# Altium PCB myPCB.PcbDoc
Units mm, origin at the board's own origin, x right, y up, seen from the top; angles counter-clockwise.
Board outline 63.88 x 49.25 mm, 4 copper layers (Top Layer, GND_layer, 3.3V_layer, Bottom Layer), stack 0.603 mm thick; 89 components, 44 nets, 257 pads, 83 vias.
Unrouted connection lines stored in the file: 1.
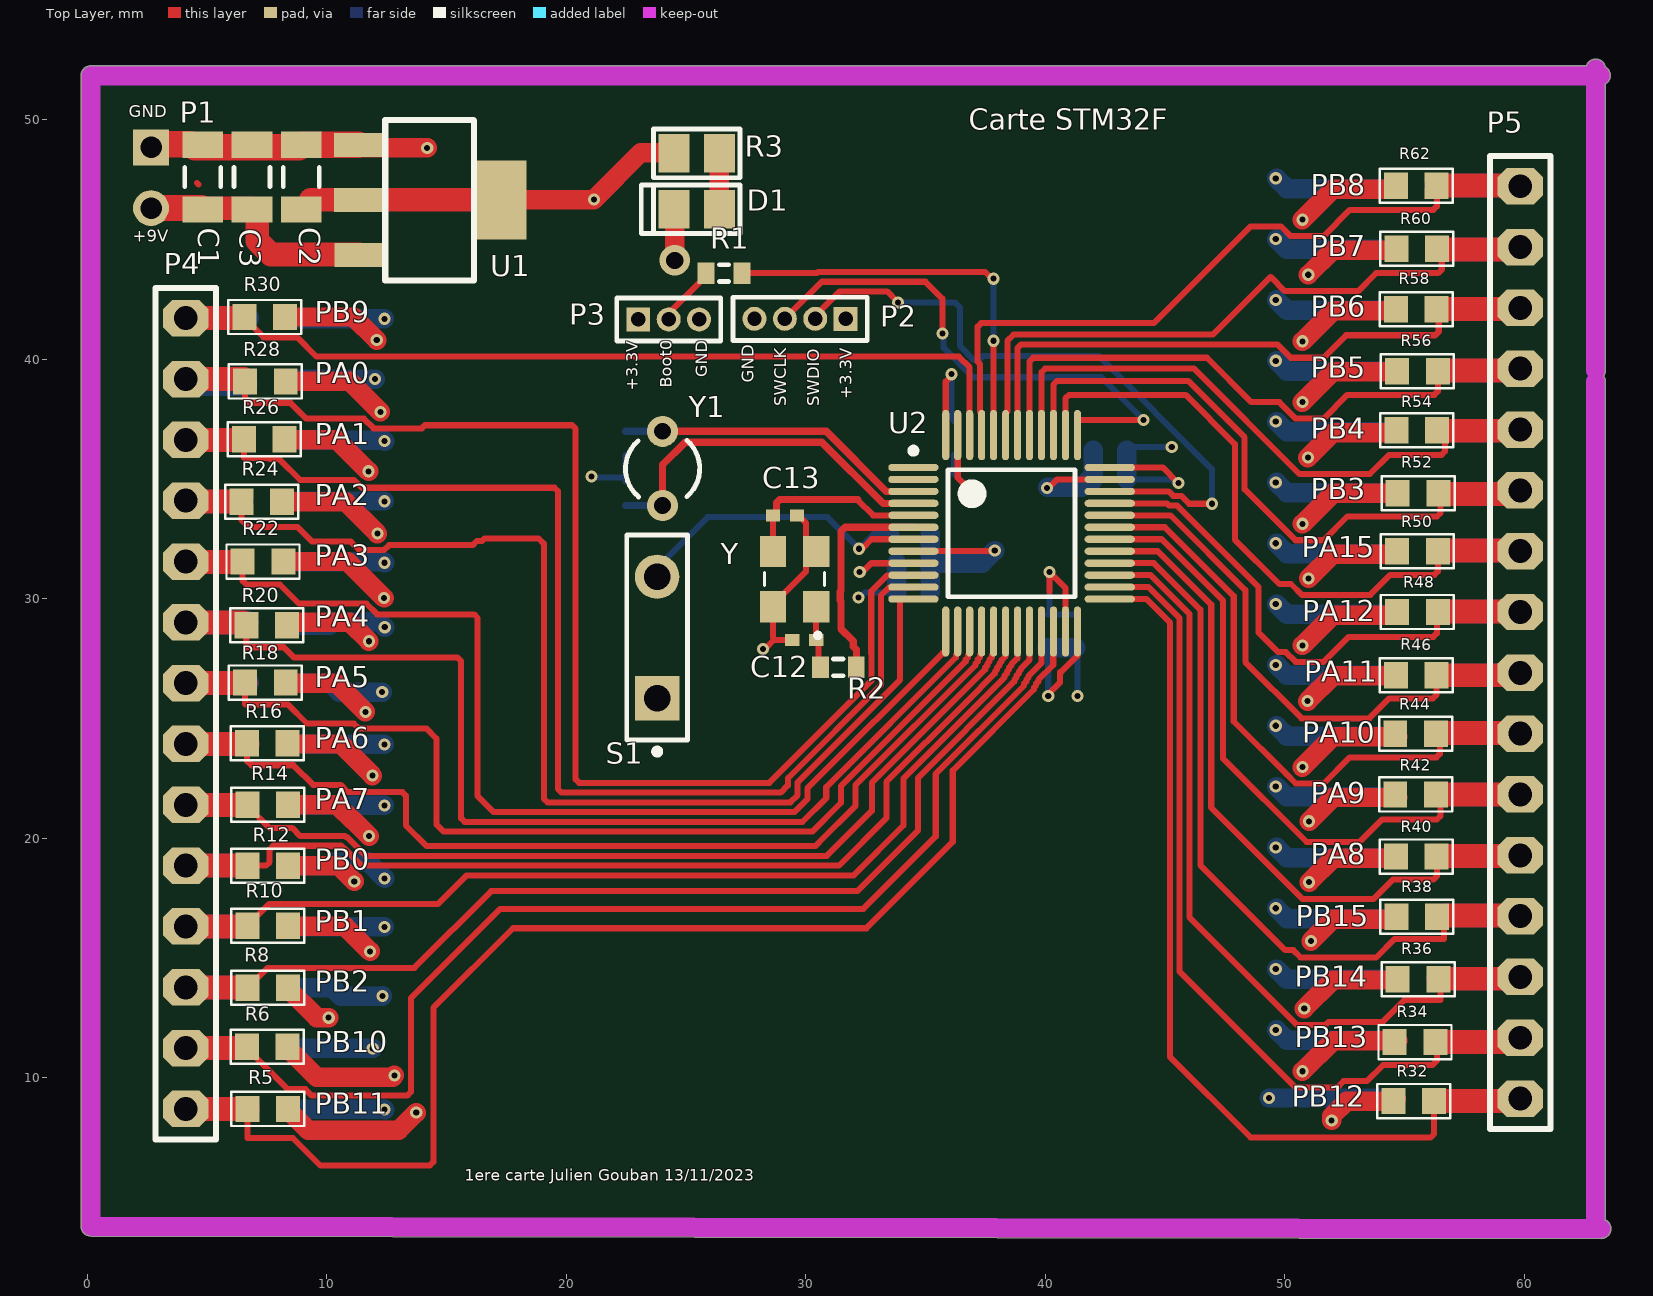
[diagram p0: Top Layer view]
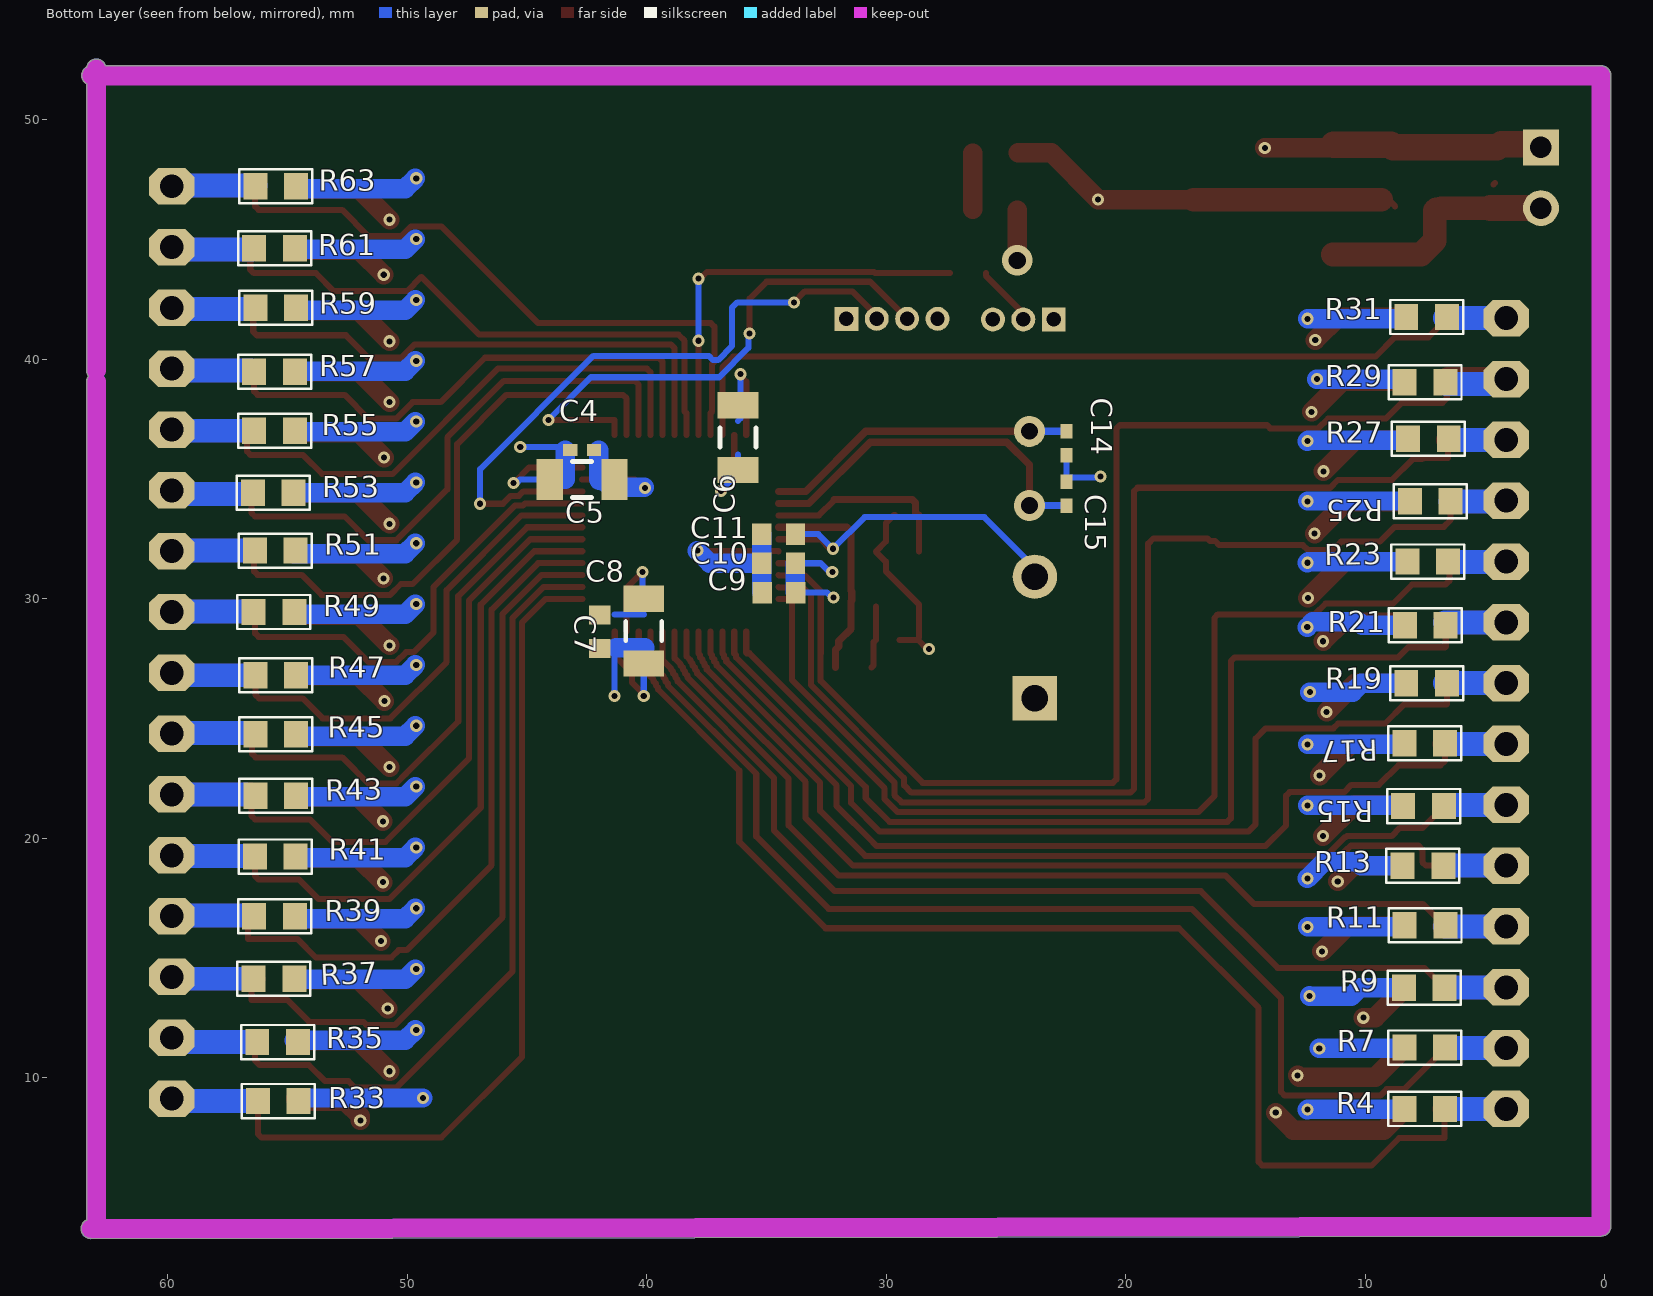
[diagram p1: Bottom Layer view, seen from below]
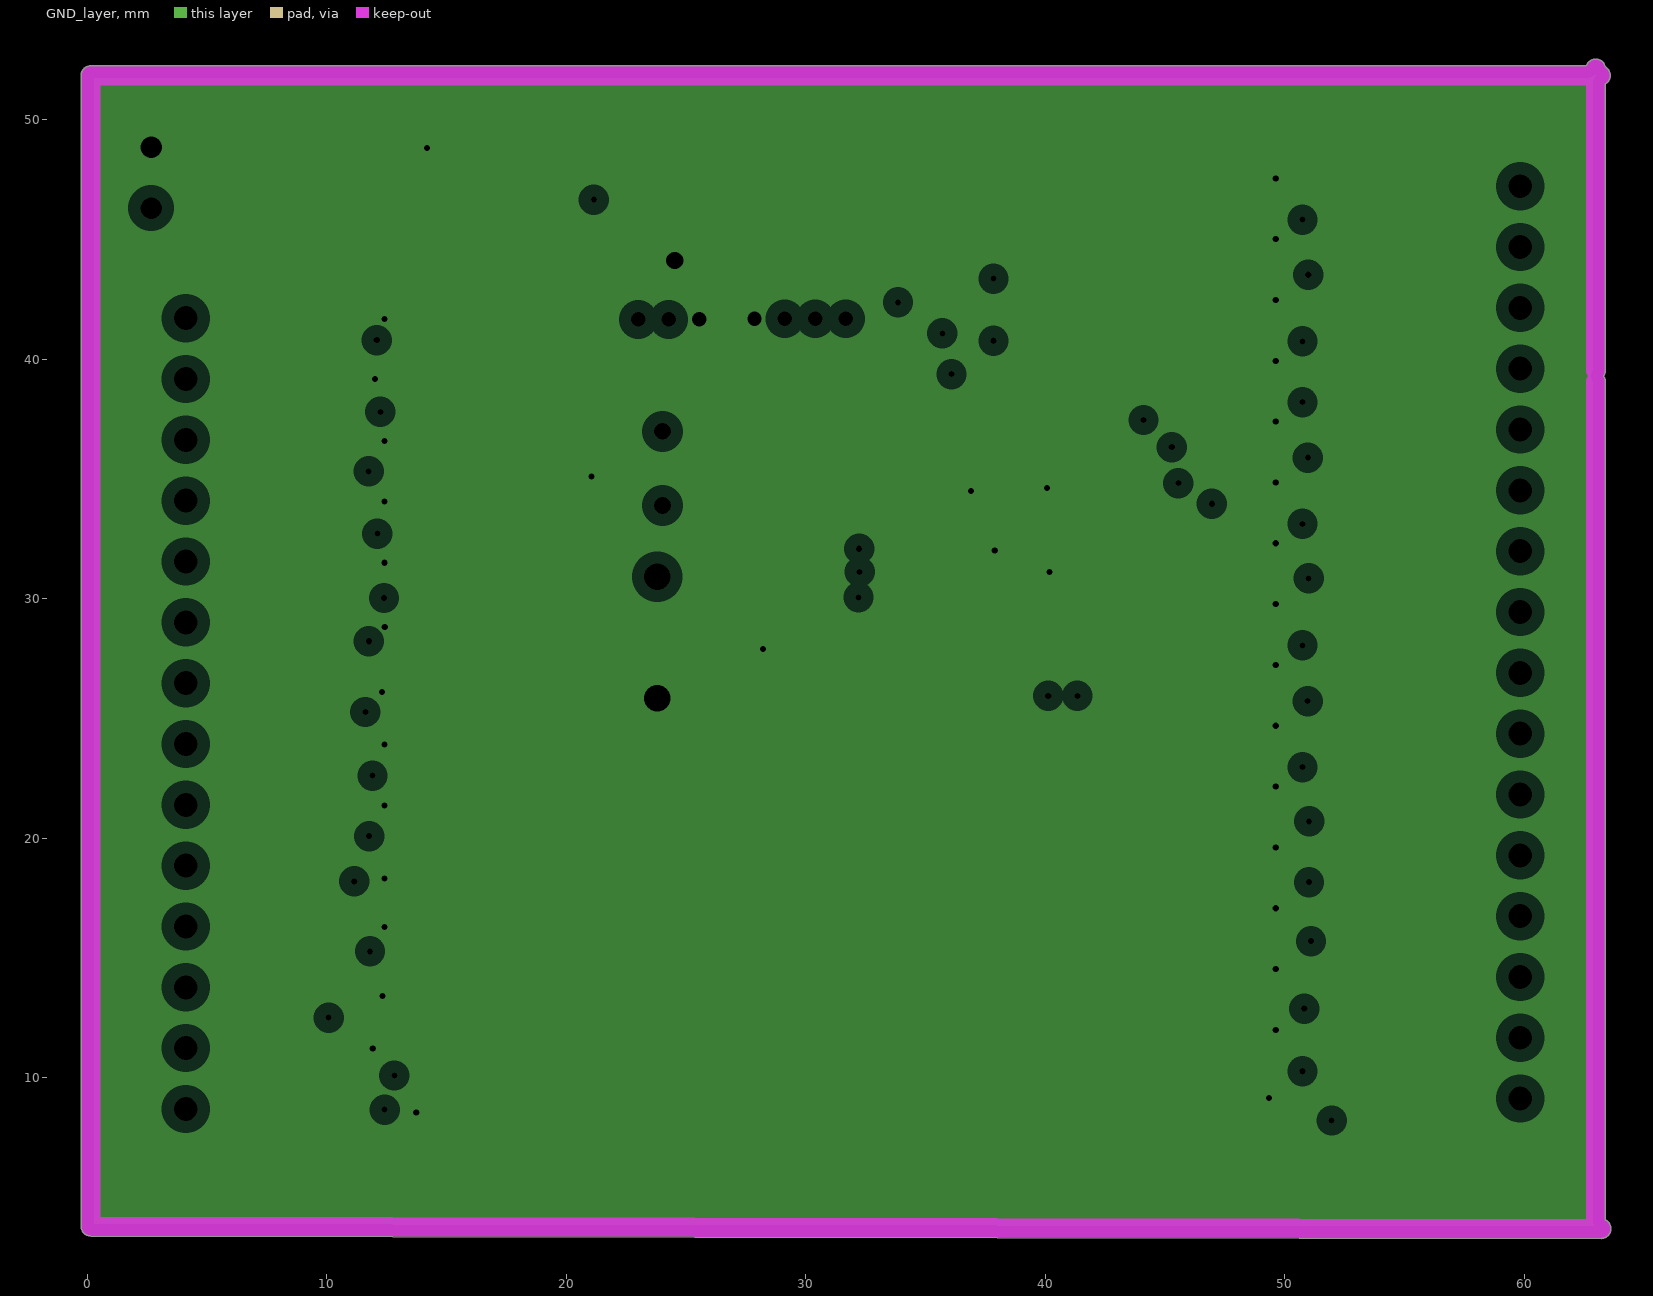
[diagram p2: GND_layer, clearances drawn from the general rule]
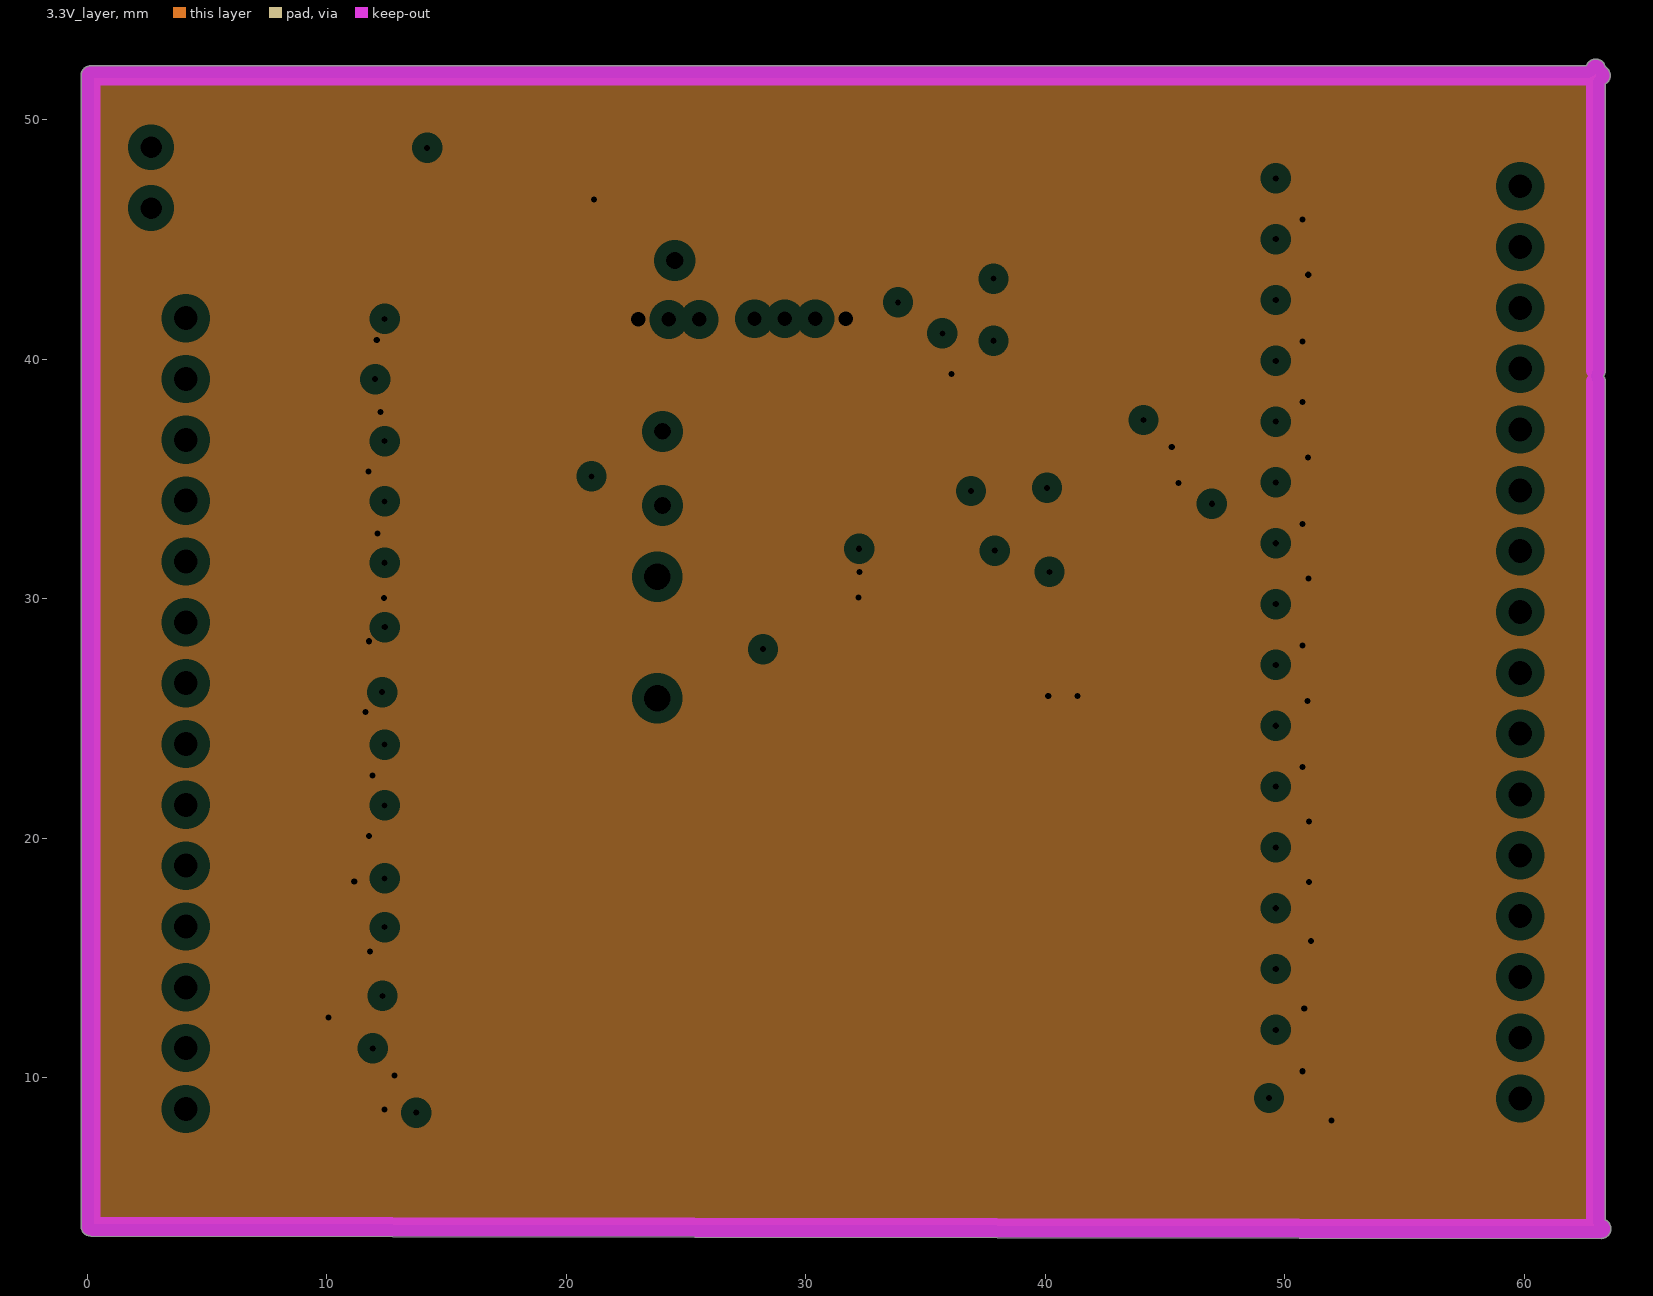
[diagram p3: 3.3V_layer, clearances drawn from the general rule]
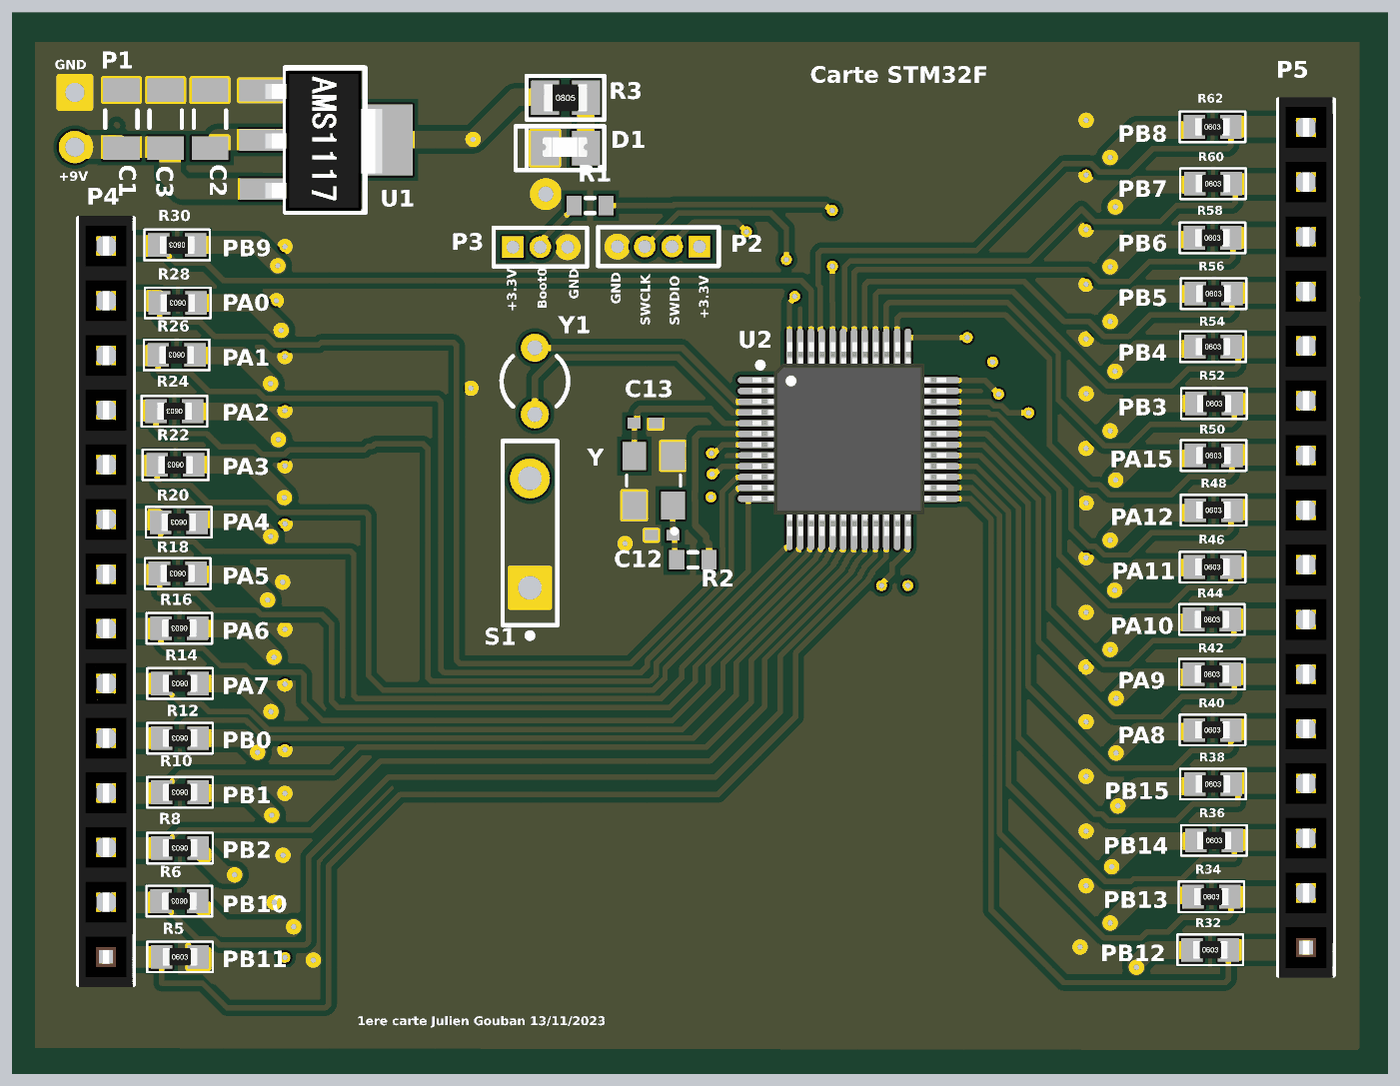
[diagram p4: 3D render of the assembled board from above, using the file's embedded part models]
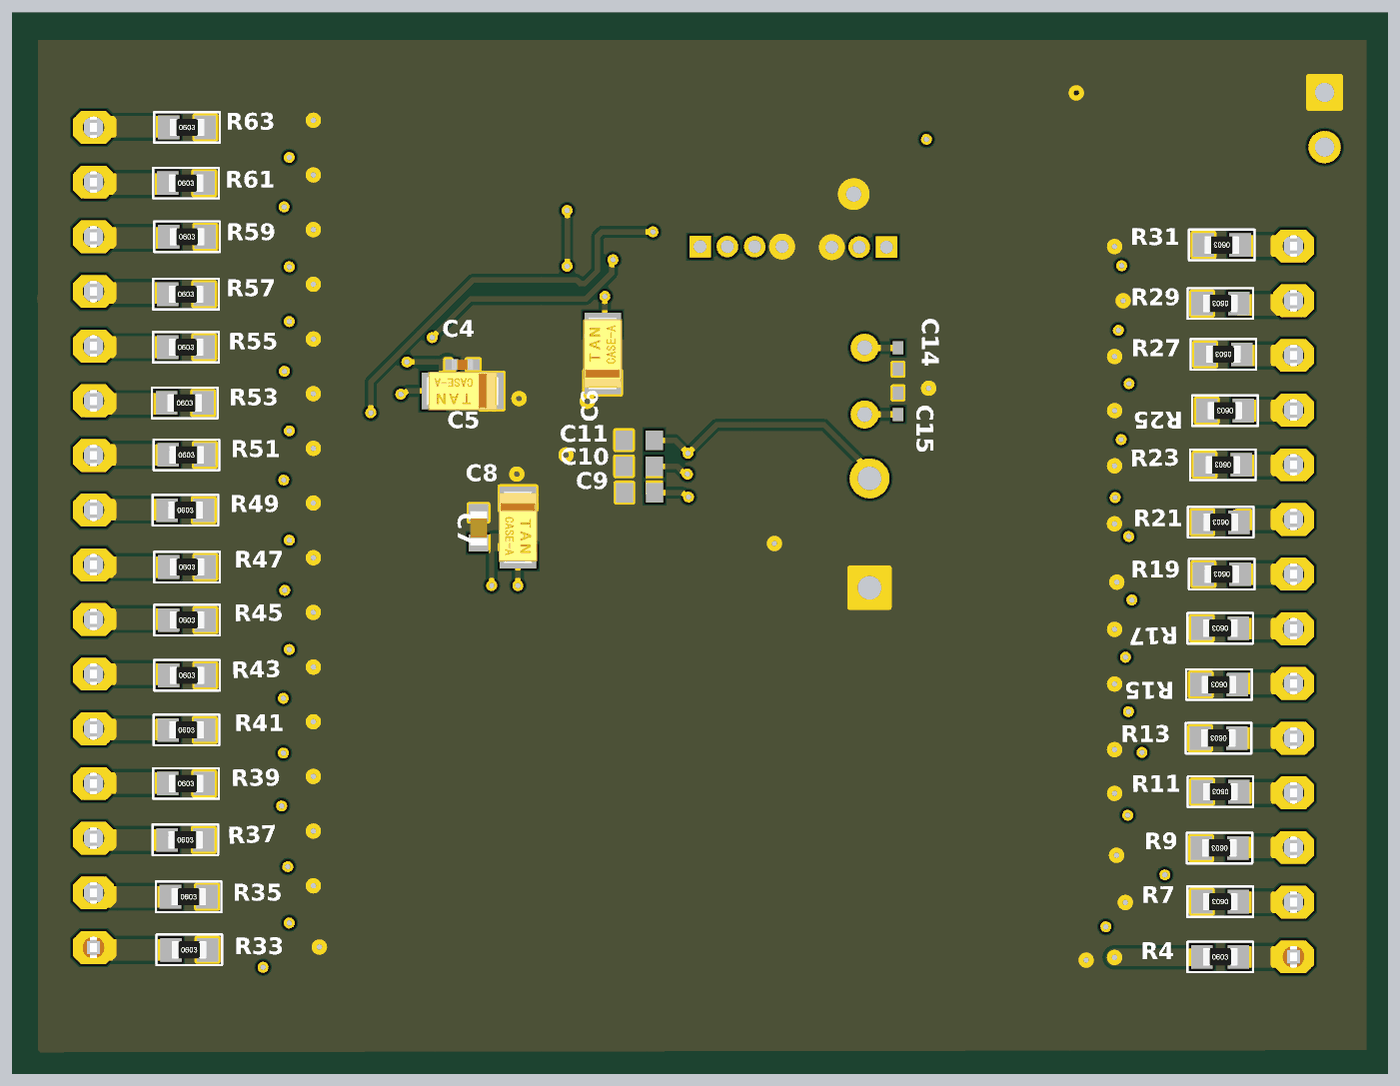
[diagram p5: 3D render of the assembled board from below, using the file's embedded part models]

## Layer stack, top to bottom
Top Solder: solder mask 0.0102, Solder Resist, Dk 3.5
Top Layer: signal copper 0.0356
Dielectric 2: prepreg 0.0711, PP-006, Dk 4.1
GND_layer: plane copper 0.035, net GND
Dielectric 1: dielectric 0.32, FR-4, Dk 4.8
3.3V_layer: plane copper 0.035, net +3.3V
Dielectric 3: prepreg 0.0711, PP-006, Dk 4.1
Bottom Layer: signal copper 0.0356
Bottom Solder: solder mask 0.0102, Solder Resist, Dk 3.5

## Board outline
0.152,3.38 cw(c0.152,3.787) -0.254,3.787 -0.254,51.841 cw(c0.152,51.841) 0.152,52.248 62.606,52.248 cw(c62.992,52.121) 63.391,52.198 cw(c63.195,51.841) 63.602,51.841 cw(c63.195,51.841) 63.399,51.489 63.399,39.531 cw(c62.992,39.531) 63.319,39.29 cw(c62.992,39.048) 63.399,39.048 63.399,13.436 63.399,4.048 cw(c63.221,3.682) 63.628,3.682 cw(c63.221,3.682) 63.221,3.276

## Design rules (kind name [scope] priority, off if disabled: settings)
Clearance "toplayer polygon" [InNamedPolygon('NONET_L01_P000')] p1: gap=0.254 ignorepadtopadclearanceinfootprint=FALSE
Clearance [All] p2: gap=0.152 ignorepadtopadclearanceinfootprint=FALSE
ComponentClearance IGNORE_Y_C12 [InComponent('Y') vs InComponent('C12')] p1: gap=0.254 collisioncheckmode=3 verticalgap=0.254 showdistances=FALSE donotcheckwithout3dbody=TRUE
ComponentClearance [All] p2: gap=0.254 collisioncheckmode=3 verticalgap=0.254 showdistances=FALSE
MinimumSolderMaskSliver [All] p1: minsoldermaskwidth=0.051
PlaneClearance [All] p1: clearance=0.508
PlaneConnect [All] p1: planeconnectstyle=Direct reliefexpansion=0.508 reliefentries=4 reliefconductorwidth=0.254 reliefairgap=0.254
PolygonConnect [All] p1: connectstyle=Direct reliefconductorwidth=0.254 reliefentries=4 polygonreliefangle="90 Angle" airgapwidth=0.254
RoutingVias [All] p1: holewidth=0.254 width=0.508 viastyle="Through Hole" minholewidth=0.254 minwidth=0.508 maxholewidth=0.711 maxwidth=1.27
SilkToSilkClearance [All] p1: silktosilkclearance=0.051
SilkToSolderMaskClearance [IsPad] p1: minsilkscreentomaskgap=0.051 clearancetoexposedcopper=TRUE
SolderMaskExpansion [All] p1: expansion=0.102 istentingtop=FALSE
UnConnectedPin [All] p1:
Width [All] p1: maxlimit=1.092 minlimit=0.254 preferedwidth=0.254
24 further rules are at their usual default settings.

## Classes and differential pairs
component class MCU: C4 C5 C6 C7 C8 C9 C10 C11 C12 C13 C14 C15 P2 P3 P4 P5 R1 R2 R4 R5 R6 R7 R8 R9 R10 R11 R12 R13 R14 R15 R16 R17 R18 R19 R20 R21 R22 R23 R24 R25 R26 R27 R28 R29 R30 R31 R32 R33 R34 R35 R36 R37 R38 R39 R40 R41 R42 R43 R44 R45 R46 R47 R48 R49 R50 R51 R52 R53 R54 R55 R56 R57 R58 R59 R60 R61 R62 R63 S1 U2 Y Y1
component class PowerSupply: C1 C2 C3 D1 P1 R3 U1

## Components (designator, comment, footprint, x,y, rotation, side; value= is the part's Value field where it differs from the comment)
C1 "Cap Semi" C1206 4.825,47.6 r270 top value=100nF
C2 "Tantalum Cap" C1206 8.94,47.6 r270 top value=100uF
C3 "Tantalum Cap" C1206 6.883,47.6 r270 top value=10uF
C4 "Cap Semi_4" 0402cap 42.709,36.195 r0 bottom value=100nF
C5 "tantalum cap" C1206tancap 42.702,34.976 r0 bottom value=100nF
C6 "tantalum cap" C1206tancap 36.196,36.717 r90 bottom value=100nF
C7 "tantalum cap" C1206tancap 40.133,28.64 r270 bottom value=100nF
C8 "Cap Semi_1" 1608[0603]cap 41.961,28.615 r270 bottom value=4.7uF
C9 "Cap Semi" 1608[0603] 34.483,30.251 r180 bottom value=10nF
C10 "Cap Semi" 1608[0603] 34.502,31.476 r180 bottom value=1uF
C11 "Cap Semi" 1608[0603] 34.502,32.69 r180 bottom value=4.7uF
C12 "Cap Semi" 0402 29.941,28.27 r0 top value=10pF
C13 "Cap Semi" 0402 29.141,33.477 r180 top value=10pF
C14 "Cap Semi" 0402 22.48,36.483 r90 bottom value=10pF
C15 "Cap Semi" 0402 22.48,34.383 r270 bottom value=10pF
D1 "LED" MY_LED_0805 25.45,46.33 r0 top
P1 "" HDR1X2H 2.666,48.844 r270 top
P2 "" MHDR1X4 31.674,41.681 r180 top
P3 "" MHDR1X3 23.012,41.656 r0 top
P4 "Header 14" MY_FE14 4.115,25.197 r90 top
P5 "Header 16" MY_FE16 59.842,28.169 r90 top
R1 "Res3" J1-0603 26.594,43.586 r180 top value=10R
R2 "Res3" J1-0603 31.37,27.127 r0 top value=10R
R3 "330R" MY_0805 25.45,48.59 r0 top
R4 "1K" MY_0603 7.518,8.687 r180 bottom
R5 "1K" MY_0603 7.544,8.687 r0 top
R6 "1K" MY_0603 7.518,11.278 r180 top
R7 "1K" MY_0603 7.518,11.252 r0 bottom
R8 "1K" MY_0603 7.544,13.741 r180 top
R9 "1K" MY_0603 7.544,13.741 r0 bottom
R10 "1K" MY_0603 7.544,16.332 r180 top
R11 "1K" MY_0603 7.507,16.358 r0 bottom
R12 "1K" MY_0603 7.544,18.847 r180 top
R13 "1K" MY_0603 7.595,18.847 r0 bottom
R14 "1K" MY_0603 7.544,21.387 r180 top
R15 "1K" MY_0603 7.569,21.336 r0 bottom
R16 "1K" MY_0603 7.518,23.952 r180 top
R17 "1K" MY_0603 7.518,23.952 r0 bottom
R18 "1K" MY_0603 7.442,26.492 r180 top
R19 "1K" MY_0603 7.442,26.467 r0 bottom
R20 "1K" MY_0603 7.493,28.88 r180 top
R21 "1K" MY_0603 7.493,28.88 r0 bottom
R22 "1K" MY_0603 7.341,31.547 r180 top
R23 "1K" MY_0603 7.391,31.547 r0 bottom
R24 "1K" MY_0603 7.29,34.036 r180 top
R25 "1K" MY_0603 7.29,34.061 r0 bottom
R26 "1K" MY_0603 7.391,36.652 r180 top
R27 "1K" MY_0603 7.366,36.678 r0 bottom
R28 "1K" MY_0603 7.442,39.065 r180 top
R29 "1K" MY_0603 7.507,39.04 r0 bottom
R30 "1K" MY_0603 7.417,41.758 r180 top
R31 "1K" MY_0603 7.442,41.758 r0 bottom
R32 "1K" MY_0603 55.397,9.017 r0 top
R33 "1K" MY_0603 55.397,9.017 r180 bottom
R34 "1K" MY_0603 55.448,11.481 r0 top
R35 "1K" MY_0603 55.423,11.481 r180 bottom
R36 "1K" MY_0603 55.575,14.097 r0 top
R37 "1K" MY_0603 55.575,14.122 r180 bottom
R38 "1K" MY_0603 55.524,16.713 r0 top
R39 "1K" MY_0603 55.55,16.739 r180 bottom
R40 "1K" MY_0603 55.499,19.228 r0 top
R41 "1K" MY_0603 55.524,19.228 r180 bottom
R42 "1K" MY_0603 55.474,21.819 r0 top
R43 "1K" MY_0603 55.499,21.768 r180 bottom
R44 "1K" MY_0603 55.474,24.359 r0 top
R45 "1K" MY_0603 55.499,24.333 r180 bottom
R46 "1K" MY_0603 55.499,26.797 r0 top
R47 "1K" MY_0603 55.499,26.797 r180 bottom
R48 "1K" MY_0603 55.55,29.439 r0 top
R49 "1K" MY_0603 55.575,29.439 r180 bottom
R50 "1K" MY_0603 55.55,31.979 r0 top
R51 "1K" MY_0603 55.524,32.004 r180 bottom
R52 "1K" MY_0603 55.575,34.392 r0 top
R53 "1K" MY_0603 55.601,34.417 r180 bottom
R54 "1K" MY_0603 55.524,37.033 r0 top
R55 "1K" MY_0603 55.55,37.008 r180 bottom
R56 "1K" MY_0603 55.55,39.497 r0 top
R57 "1K" MY_0603 55.55,39.472 r180 bottom
R58 "1K" MY_0603 55.499,42.088 r0 top
R59 "1K" MY_0603 55.499,42.139 r180 bottom
R60 "1K" MY_0603 55.524,44.602 r0 top
R61 "1K" MY_0603 55.55,44.628 r180 bottom
R62 "1K" MY_0603 55.499,47.244 r0 top
R63 "1K" MY_0603 55.499,47.219 r180 bottom
S1 "" SPST-2 23.801,28.372 r90 top
U1 "" "4-pin SOT" 12.446,46.634 r270 top
U2 "" STM-LQFP48_M 38.602,32.726 r0 top
Y "ECS-80-12-33-JGN-TR" XTAL_ECS-240-8-33-AGN-TR 29.541,30.81 r90 top
Y1 "" R38 24.029,35.433 r0 top

## Footprints (in the part's own frame and the unit in brackets; to place one, negate y for a bottom-side part, rotate by r counter-clockwise, add the part's x,y. Pads: shape width x height; smd on the part's side, far side on the other; paste and mask are expansions set on the pad)
"4-pin SOT" [mm]
  rect 1x2.2 smd: 0(2.286,-1.016) 1(-2.3,-1.05) 2(0,-1.05)
  rect 3.3x2.2 smd: 2(0,4.8)
  silkscreen extent -3.35,0 3.35,3.7, body extent -3.2,-1.72 3.3,5.28, height 1.36
0402 [mm] "Chip Capacitor, Body 1.0x0.5mm, IPC High Density"
  rect 0.6x0.5 smd: 1(-0.5,0) 2(0.5,0)
  body extent -0.55,-0.3 0.55,0.3, height 1.3
0402cap [mm]
  rect 0.6x0.5 smd: 1(-0.5,0) 2(0.5,0)
  body extent -0.5,-0.25 0.5,0.25, height 0.51
1608[0603] [mm] "Chip Capacitor, Body 1.6x0.8mm, IPC High Density"
  rect 0.8x0.9 smd: 1(-0.7,0) 2(0.7,0)
  body extent -0.87,-0.48 0.87,0.48, height 1.3
1608[0603]cap [mm]
  rect 0.8x0.9 smd: 1(-0.7,0) 2(0.7,0)
  body extent -0.77,-0.4 0.83,0.4, height 0.9
C1206 [mm] "Chip Capacitor, Body 3.2x1.6mm, IPC High Density"
  rect 1.1x1.7 smd: 1(-1.35,0) 2(1.35,0)
  silkscreen extent -0.4,-0.75 0.4,0.75, body extent -1.7,-0.9 1.7,0.9, height 1.3
C1206tancap [mm]
  rect 1.1x1.7 smd: 1(-1.35,0) 2(1.35,0)
  silkscreen extent -0.4,-0.75 0.4,0.75, body extent -1.7,-0.9 1.7,0.9, height 1.8
HDR1X2H [mm] "Connector; Header; 2 Position; Right Angle"
  rect 1.5x1.5 hole 0.9: 1(0,0)
  round 1.5 hole 0.9: 2(2.54,0)
J1-0603 [mm] "Chip Resistor, Body 1.6x0.8mm, IPC High Density"
  rect 0.7x0.9 smd: 1(-0.75,0) 2(0.75,0)
  silkscreen extent -0.2,-0.35 0.2,0.35, body extent -0.85,-0.48 0.85,0.48, height 0.9
MHDR1X3 [mm] "Connector; Header; 3 Position"
  rect 1x1 hole 0.6: 1(0,0)
  round 1 hole 0.6: 2(1.27,0) 3(2.54,0)
  silkscreen extent -0.9,-0.9 3.44,0.9
MHDR1X4 [mm] "Connector; Header; 4 Position"
  rect 1x1 hole 0.6: 1(0,0)
  round 1 hole 0.6: 2(1.27,0) 3(2.54,0) 4(3.81,0)
  silkscreen extent -0.9,-0.9 4.71,0.9
MY_0603 [mm]
  rect 1x1.1 smd: 1(-0.85,0) 2(0.85,0)
  silkscreen extent -1.52,-0.71 1.52,0.71, body extent -0.8,-0.4 0.8,0.4, height 0.44
MY_0805 [mm]
  rect 1.3x1.6 smd: 1(-0.95,0) 2(0.95,0)
  silkscreen extent -1.8,-1.02 1.8,1.02, body extent -1,-0.62 1,0.63, height 0.59
MY_FE14 [mm]
  oct 1.524x1.905 hole 1: 1(-16.51,0) 2(-13.97,0) 3(-11.43,0) 4(-8.89,0) 5(-6.35,0) 6(-3.81,0) 7(-1.27,0) 8(1.27,0) 9(3.81,0) 10(6.35,0) 11(8.89,0) 12(11.43,0) 13(13.97,0) 14(16.51,0)
  silkscreen extent -17.78,-1.27 17.78,1.27, body extent -17.9,-1.25 17.91,1.25, height 8.5
MY_FE16 [mm]
  oct 1.524x1.905 hole 1: 1(-19.05,0) 2(-16.51,0) 3(-13.97,0) 4(-11.43,0) 5(-8.89,0) 6(-6.35,0) 7(-3.81,0) 8(-1.27,0) 9(1.27,0) 10(3.81,0) 11(6.35,0) 12(8.89,0) 13(11.43,0) 14(13.97,0) 15(16.51,0) 16(19.05,0)
  silkscreen extent -20.32,-1.27 20.32,1.27, body extent -20.44,-1.25 20.45,1.25, height 8.5
MY_LED_0805 [mm]
  rect 1.3x1.6 smd: A(0.95,-0.076) K(-0.95,-0.076)
  silkscreen extent -2.31,-1.09 1.8,0.94, body extent -1.06,-0.48 1.01,0.42, height 0.86
R38 [mm] "Crystal, Thru-Hole; 2 Leads; Body 3.1 x 8.2 mm (Dia.xH)"
  round 1.3 hole 0.7: 1(0,1.55) 2(0,-1.55)
  silkscreen extent -1.55,-1.19 1.55,1.17
SPST-2 [mm] "Switch; 2 Leads"
  rect 1.85x1.85 hole 1.1: 1(-2.54,0)
  round 1.85 hole 1.1: 2(2.54,0)
  silkscreen extent -4.89,-1.27 4.28,1.27
STM-LQFP48_M [mm]
  oval 2.1x0.3 smd: 1(-4.1,2.75) 2(-4.1,2.25) 3(-4.1,1.75) 4(-4.1,1.25) 5(-4.1,0.75) 6(-4.1,0.25) 7(-4.1,-0.25) 8(-4.1,-0.75) 9(-4.1,-1.25) 10(-4.1,-1.75) 11(-4.1,-2.25) 12(-4.1,-2.75) 25(4.1,-2.75) 26(4.1,-2.25) 27(4.1,-1.75) 28(4.1,-1.25) 29(4.1,-0.75) 30(4.1,-0.25) 31(4.1,0.25) 32(4.1,0.75) 33(4.1,1.25) 34(4.1,1.75) 35(4.1,2.25) 36(4.1,2.75)
  oval 0.3x2.1 smd: 13(-2.75,-4.1) 14(-2.25,-4.1) 15(-1.75,-4.1) 16(-1.25,-4.1) 17(-0.75,-4.1) 18(-0.25,-4.1) 19(0.25,-4.1) 20(0.75,-4.1) 21(1.25,-4.1) 22(1.75,-4.1) 23(2.25,-4.1) 24(2.75,-4.1) 37(2.75,4.1) 38(2.25,4.1) 39(1.75,4.1) 40(1.25,4.1) 41(0.75,4.1) 42(0.25,4.1) 43(-0.25,4.1) 44(-0.75,4.1) 45(-1.25,4.1) 46(-1.75,4.1) 47(-2.25,4.1) 48(-2.75,4.1)
  silkscreen extent -4.22,-2.65 2.65,3.57, body extent -4.47,-4.49 4.53,4.51, height 1.56
XTAL_ECS-240-8-33-AGN-TR [mm]
  rect 1.3x1.1 smd: 1(-1.15,-0.9) 2(1.15,-0.9) 3(1.15,0.9) 4(-1.15,0.9)
  silkscreen extent -2.45,-1.25 0.27,1.25

## Part data
C1 C4 C9 C10 C11 C12 C13 C14 C15: "Capacitor (Semiconductor SIM Model)", LatestRevisionDate=29-May-2009, LatestRevisionNote="IPC-7351 Footprint Added.", PackageDescription="Chip Capacitor", PackageReference=C1206, Published=8-Jun-2000, Publisher="Altium Limited"
C2 C3: library part "Cap Semi", "Capacitor (Semiconductor SIM Model)", LatestRevisionDate=29-May-2009, LatestRevisionNote="IPC-7351 Footprint Added.", PackageDescription="Chip Capacitor", PackageReference=C1206, Published=8-Jun-2000, Publisher="Altium Limited"
C5: library part "Cap Semi_5", "Capacitor (Semiconductor SIM Model)", LatestRevisionDate=29-May-2009, LatestRevisionNote="IPC-7351 Footprint Added.", PackageDescription="Chip Capacitor", PackageReference=C1206, Published=8-Jun-2000, Publisher="Altium Limited"
C6 C7: library part "Cap Semi_6", "Capacitor (Semiconductor SIM Model)", LatestRevisionDate=29-May-2009, LatestRevisionNote="IPC-7351 Footprint Added.", PackageDescription="Chip Capacitor", PackageReference=C1206, Published=8-Jun-2000, Publisher="Altium Limited"
C8: library part "Cap Semi_1_1", "Capacitor (Semiconductor SIM Model)", LatestRevisionDate=29-May-2009, LatestRevisionNote="IPC-7351 Footprint Added.", PackageDescription="Chip Capacitor", PackageReference=C1206, Published=8-Jun-2000, Publisher="Altium Limited"
D1: "Typical INFRARED GaAs LED", ASiD Part Number=LED-AS
P1: library part "Header 2H", "Header, 2-Pin, Right Angle", Voltage=9V, LatestRevisionDate=17-Jul-2002, LatestRevisionNote="Re-released for DXP Platform.", Publisher="Altium Limited"
P2: library part MHDR1X4, "Header, 4-Pin", LatestRevisionDate=17-Jul-2002, LatestRevisionNote="Re-released for DXP Platform.", Publisher="Altium Limited"
P3: library part MHDR1X3, "Header, 3-Pin", LatestRevisionDate=17-Jul-2002, LatestRevisionNote="Re-released for DXP Platform.", Publisher="Altium Limited"
P4: "Header, 14-Pin", ASiD Part Number="Header 14-AS"
P5: "Header, 16-Pin", ASiD Part Number="Header 16-AS"
R1 R2: "Resistor", LatestRevisionDate=29-May-2009, LatestRevisionNote="IPC-7351 Footprint Added.", PackageDescription="Chip Resistor", PackageReference=J1-0603, Published=8-Jun-2000, Publisher="Altium Limited"
R3 R4 R5 R6 R7 R8 R9 R10 R11 R12 R13 R14 R15 R16 R17 R18 R19 R20 R21 R22 R23 R24 R25 R26 R27 R28 R29 R30 R31 R32 R33 R34 R35 R36 R37 R38 R39 R40 R41 R42 R43 R44 R45 R46 R47 R48 R49 R50 R51 R52 R53 R54 R55 R56 R57 R58 R59 R60 R61 R62 R63: library part Res, "Standard resistor", ASiD Part Number=Res-AS
S1: library part SW-PB, "Switch", LatestRevisionDate=17-Jul-2002, LatestRevisionNote="Re-released for DXP Platform.", PackageDescription="Switch; 2 Leads", PackageReference=SPST-2, Published=24-Mar-1999, Publisher="Altium Limited"
U1: library part LM1117, "The LM1117 is a low dropout voltage regulator with a / dropout of 1.2 V at 800 mA of load current. / The LM1117 is available in an adjustable version, / which can set the output voltage from 1.25 V to 13.8 V / with only two external resistors. In addition, the device / is available in five fixed voltages, 1.8 V, 2.5 V, 3.3 V, / and 5 V. / The LM1117 offers current limiting and thermal / shutdown. The circuit includes a Zener trimmed band- / gap reference to assure output voltage accuracy to / within ±1%. / A minimum of 10-μF tantalum capacitor is required / at the output to improve the transient response and / stability.", Output voltage=3.3V, ComponentLink1Description=Datasheet, ComponentLink1URL=https://www.ti.com/lit/ds/symlink/lm1117.pdf?ts=1696488593782&ref_url=https%253A%252F%252Fwww.google.com%252F
U2: library part STM32F103C8T6, "ARM Cortex-M3 32-bit MCU, 64 KB Flash, 20 KB Internal RAM, 37 I/Os, 48-pin LQFP, -40 to 85 degC, Tray", I/Os (High Current)=37, Operating Frequency(F) (Processor speed) (MHz)=72, Supply Voltage(Vcc) min (V)=2, A/D Converter="2x12-bit (10 Channel)", ComponentLink1Description="Manufacturer URL", ComponentLink1URL=http://www.st.com/web/en/home.html, ComponentLink2Description=Datasheet, ComponentLink2URL=http://www.st.com/st-web-ui/static/active/en/resource/technical/document/datasheet/CD00161566.pdf, ComponentLink3Description="Package Specification", ComponentLink3URL=http://www.st.com/st-web-ui/static/active/en/resource/technical/document/datasheet/DM00058181.pdf, Core="ARM Cortex-M3", DatasheetVersion="Rev. 16", FLASH Size (Prog) (kB)=64, Internal RAM Size (kB)=20, Mounting Technology="Surface Mount", PackageDescription="48-Pin Low Profile Quad Flat Package, 7 x 7 mm Body, 0.5 mm Pitch", PackageReference=LQFP48, PackageVersion="Rev. 6, 06/2013", Packing=Tray, PartNumber=STM32F103C8T6
Y: "8MHz Â±20ppm Crystal 12pF 400 Ohms 4-SMD, No Lead", Package="SMD-4 ECS International", Availability=Warning, BuyPart=h, MF="ECS Inc.", Mouser-Purchase-URL=https://snapeda.com/shop?store=Mouser&id=4477300, MP=ECS-80-12-33-JGN-TR, Price=None, SnapEDA_Link=https://www.snapeda.com/parts/ECS-80-12-33-JGN-TR/ECS%20Inc./view-part/4477300/?ref=snap
Y1: library part XTAL, "Crystal Oscillator", LatestRevisionDate=17-Jul-2002, LatestRevisionNote="Re-released for DXP Platform.", PackageDescription="Crystal, Thru-Hole; 2 Leads; Body 3.1 x 8.2 mm (Dia.xH)", PackageReference=R38, Published=8-Jun-2000, Publisher="Altium Limited"

## Via types
v1: diameter 0.508, hole 0.254, Top Layer to Bottom Layer, 82 vias
v2: diameter 1.27, hole 0.711, Top Layer to Bottom Layer, 1 vias

## Nets (pads, with @x,y where several pads share a name; then routed paths per layer and width w, separated by ;. In a path a pad name is that pad's centre, name@x,y a point inside that pad or via, vN(x,y) a via of type N, cw(c..) or ccw(c..) an arc to the next point about the centre after c; other vN are vias at no path point)
32KHz_01: C14.2 U2.3 Y1.1 | length 13.1
  Top Layer w0.3: Y1.1 30.861,36.983 33.368,34.476 U2.3
  Bottom Layer w0.3: C14.2 Y1.1
32KHz_02: C15.2 U2.4 Y1.2 | length 15.2
  Top Layer w0.3: Y1.2 24.029,35.585 24.975,36.531 30.674,36.531 33.229,33.976 U2.4
  Bottom Layer w0.3: C15.2 Y1.2
+3.3V: C2.2 C4.2 C5.2 C6.2 C7.2 C8.2 C9.2 C10.2 P2.1 P3.1 R3.1 R4.1 R6.1 R8.1 R10.1 R12.1 R14.1 R16.1 R18.1 R20.1 R22.1 R24.1 R26.1 R28.1 R30.1 R32.1 R34.1 R36.1 R38.1 R40.1 R42.1 R44.1 R46.1 R48.1 R50.1 R52.1 R54.1 R56.1 R58.1 R60.1 R62.1 U1.2 U2.9 U2.24 U2.36 U2.48 | length 168.5
  Top Layer w0.254: C2.2@8.754,46.377 C2.2@9.154,46.777 ; U1.2@17.169,46.65 U1.2@17.179,46.66 ; R3.1@24.485,48.616 24.485,48.605 R3.1 ; v1(32.259,31.115) 32.383,31.115 32.743,31.476 U2.9 ; U2.48 35.852,39.059 36.094,39.301 v1(36.094,39.37) ; v1(40.133,25.933) 40.133,26.01 40.615,26.492 40.615,26.924 40.657,26.924 41.343,27.61 41.343,28.617 U2.24 ; U2.36 44.916,35.476 v1(45.568,34.823)
  Top Layer w0.813: R24.1@8.233,34.036 10.795,34.036 v1(12.116,32.715) ; R22.1@8.284,31.547 10.871,31.547 v1(12.395,30.023) ; R26.1@8.335,36.627 10.439,36.627 v1(11.752,35.314) ; R30.1@8.36,41.758 11.125,41.758 v1(12.09,40.793) ; R6.1@8.368,11.252 8.368,11.228 9.588,10.008 12.751,10.008 v1(12.827,10.084) ; R28.1@8.386,39.065 10.973,39.065 v1(12.245,37.793) ; R8.1@8.394,13.767 8.394,13.691 9.588,12.497 v1(10.084,12.497) ; R10.1@8.394,16.307 10.77,16.307 v1(11.811,15.266) ; R12.1 10.49,18.847 v1(11.15,18.187) ; R14.1 10.439,21.387 11.093,20.733 11.119,20.733 v1(11.773,20.079) ; R16.1@8.394,23.927 10.592,23.927 v1(11.913,22.606) ; R18.1@8.394,26.467 10.414,26.467 v1(11.617,25.264) ; R20.1@8.394,29.007 10.973,29.007 v1(11.764,28.216) ; U1.2@17.179,46.66 v1(21.158,46.66) 23.113,48.616 R3.1@24.485,48.616 ; v1(50.749,10.262) 52.019,11.532 R34.1@54.725,11.532 ; v1(50.749,22.962) 52.019,24.232 R44.1@54.725,24.232 ; v1(50.749,28.042) 52.019,29.312 R48.1@54.725,29.312 ; v1(50.749,33.122) 52.019,34.392 R52.1 ; v1(50.749,38.202) 52.019,39.472 R56.1@54.725,39.472 ; v1(50.749,40.742) 52.019,42.012 R58.1@54.725,42.012 ; v1(50.749,45.822) 52.019,47.092 R62.1@54.725,47.092 ; v1(50.822,12.874) 52.019,14.072 R36.1@54.725,14.072 ; v1(50.963,25.715) 52.019,26.772 R46.1@54.725,26.772 ; v1(50.976,35.888) 52.019,36.932 R54.1@54.725,36.932 ; v1(50.991,43.524) 52.019,44.552 R60.1@54.725,44.552 ; v1(51.007,30.84) 52.019,31.852 R50.1@54.725,31.852 ; v1(51.022,18.155) 52.019,19.152 R40.1@54.725,19.152 ; v1(51.026,20.698) 52.019,21.692 R42.1@54.725,21.692 ; v1(51.105,15.697) 52.019,16.612 R38.1@54.725,16.612 ; v1(51.968,8.204) 51.968,8.382 52.587,9.001 54.581,9.001 54.674,9.094 R32.1@54.674,9.144
  Top Layer w0.991: C2.2@9.34,46.65 U1.2@17.169,46.65
  Bottom Layer w0.254: R4.1 R4.1@8.394,8.661 ; v1(32.207,30.048) 32.276,30.048 32.479,30.251 C9.2 C9.2@33.802,30.271 ; v1(32.259,31.115) 32.383,31.115 32.743,31.476 C10.2 ; v1(36.094,39.37) 36.094,37.519 36.196,37.417 ; v1(40.133,25.933) 40.133,27.94 ; 41.338,27.94 41.352,27.926 v1(41.352,25.933) ; 43.409,34.983 43.402,34.976 45.292,34.976 45.445,34.823 v1(45.568,34.823) ; C4.2@43.409,36.195 43.536,36.322 v1(45.288,36.322)
  Bottom Layer w0.813: R4.1@8.394,8.661 8.407,8.674 12.408,8.674 v1(12.421,8.661) ; C9.2@33.802,30.271 C10.2 ; 40.082,27.94 40.133,27.94 41.287,27.94 ; 43.409,34.983 C4.2@43.409,36.195
+9V: C1.2 C3.2 P1.2 U1.0 | length 10.1
  Top Layer w0.254: 4.593,47.346 4.648,47.291
  Top Layer w0.991: C1.2@4.825,46.304 C3.2@6.676,46.304 ; C3.2@6.828,46.304 C3.2 7.043,46.25 7.097,46.195 7.097,44.944 7.678,44.364 U1.0@11.353,44.364
  Top Layer w1.092: P1.2 C1.2@4.771,46.304
BOOT0: P3.2 R1.2 | length 2.6
  Top Layer w0.254: P3.2 24.425,41.799 24.425,42.068 25.844,43.486 R1.2
GND: C1.1 C2.1 C3.1 C4.1 C5.1 C6.1 C7.1 C8.1 C9.1 C10.1 C11.1 C12.1 C13.1 C14.1 C15.1 D1.K P1.1 P2.4 P3.3 R5.2 R7.2 R9.2 R11.2 R13.2 R15.2 R17.2 R19.2 R21.2 R23.2 R25.2 R27.2 R29.2 R31.2 R33.2 R35.2 R37.2 R39.2 R41.2 R43.2 R45.2 R47.2 R49.2 R51.2 R53.2 R55.2 R57.2 R59.2 R61.2 R63.2 S1.1 U1.1 U2.8 U2.23 U2.35 U2.47 Y.2 Y.4 | length 191.6
  Top Layer w0.254: C2.1@8.835,48.844 C2.1 ; U1.1@11.319,48.95 U1.1@11.45,48.819 ; D1.K D1.K@24.536,46.218 ; v1(28.22,27.889) 28.289,27.889 28.67,28.27 C12.1 ; 28.641,28.366 Y.4 28.641,29.76 30.018,31.137 30.018,31.537 Y.2 30.018,32.383 30.018,33.15 29.691,33.477 C13.1 ; U2.8 34.511,31.985 37.878,31.985 v1(37.898,32.004) ; U2.47 36.352,35.048 v1(36.907,34.493) ; v1(40.082,34.62) 40.151,34.62 40.506,34.976 U2.35 ; 40.184,30.301 v1(40.184,31.115) 40.852,30.447 U2.23
  Top Layer w0.813: R5.2 8.487,8.593 8.487,8.543 9.228,7.802 13,7.802 13.005,7.798 v1(13.741,8.534) ; U1.1@11.45,48.819 v1(14.198,48.819) ; v2(24.536,44.12) D1.K@24.536,46.218
  Top Layer w1.092: P1.1@2.48,48.971 C1.1@4.309,48.971 ; C1.1@4.496,48.844 C2.1@8.835,48.844 ; C2.1 U1.1@11.319,48.95
  Bottom Layer w0.254: v1(21.057,35.103) 21.106,35.054 22.357,35.054 C15.1@22.48,34.931 ; C15.1 C15.1@22.48,34.931 ; C14.1 C15.1@22.48,34.931 ; C9.1 C9.1@35.202,30.271 ; 36.196,36.017 36.196,35.204 v1(36.907,34.493) ; v1(40.082,34.62) v1@40.115,34.653 ; v1(40.184,31.115) 40.184,29.391 40.133,29.34 41.338,29.34 41.352,29.326 ; 42.002,34.976 42.009,34.983 ; v1(49.632,11.989) v1@49.666,11.989
  Bottom Layer w0.813: R19.2@8.386,26.454 10.172,26.454 10.532,26.093 v1(12.318,26.093) ; R7.2@8.407,11.214 v1(11.923,11.214) ; R9.2@8.407,13.754 10.222,13.754 10.583,13.393 12.318,13.393 v1(12.331,13.406) ; R11.2@8.407,16.294 v1@12.408,16.294 ; R13.2@8.407,18.834 10.164,18.834 10.329,18.999 11.735,18.999 v1(12.421,18.313) ; R15.2@8.407,21.374 v1@12.408,21.374 ; R17.2@8.407,23.914 v1@12.408,23.914 ; R21.2@8.407,28.859 8.427,28.88 10.122,28.88 10.271,29.029 12.199,29.029 v1(12.424,28.803) ; R23.2@8.407,31.534 12.383,31.534 v1(12.422,31.496) ; R25.2@8.407,34.074 v1@12.408,34.074 ; R27.2@8.407,36.614 12.38,36.614 v1(12.421,36.574) ; R29.2@8.407,39.154 12.011,39.154 v1(12.022,39.165) ; R31.2@8.407,41.694 v1@12.408,41.694 ; C9.1@35.202,30.271 C10.1 ; C11.1 C10.1 ; v1(37.898,32.004) 37.369,31.476 C10.1 ; v1@40.115,34.653 41.526,34.653 41.805,34.932 41.996,34.932 42.002,34.939 42.002,34.976 ; 42.009,34.983 C4.1@42.009,36.195 ; v1(49.352,9.144) R33.2@54.573,9.144 ; v1@49.666,11.989 50.098,11.557 R35.2@54.725,11.557 ; v1@49.666,14.529 50.098,14.097 R37.2@54.725,14.097 ; v1@49.666,17.069 50.098,16.637 R39.2@54.725,16.637 ; v1@49.666,19.609 50.098,19.177 R41.2@54.725,19.177 ; v1@49.666,22.149 50.098,21.717 R43.2@54.725,21.717 ; v1@49.666,24.689 50.098,24.257 R45.2@54.725,24.257 ; v1@49.666,27.229 50.098,26.797 R47.2 R47.2@54.725,26.797 ; v1@49.666,29.769 50.098,29.337 R49.2@54.725,29.337 ; v1@49.666,32.309 50.098,31.877 R51.2@54.725,31.877 ; v1@49.666,34.849 50.098,34.417 R53.2@54.725,34.417 ; v1@49.666,37.389 50.098,36.957 R55.2@54.725,36.957 ; v1@49.666,39.929 50.098,39.497 R57.2@54.725,39.497 ; v1@49.666,42.469 50.098,42.037 R59.2@54.725,42.037 ; v1@49.666,45.009 50.098,44.577 R61.2@54.725,44.577 ; v1@49.666,47.549 50.098,47.117 R63.2@54.725,47.117
  other v1: 49.632,14.529 12.421,16.281 49.632,17.069 49.632,19.609 12.421,21.361 49.632,22.149 12.421,23.901 49.632,24.689 49.632,27.229 49.632,29.769 49.632,32.309 12.421,34.061 49.632,34.849 49.632,37.389 49.632,39.929 12.421,41.681 49.632,42.469 49.632,45.009 49.632,47.549
IN/OUT: C12.2 R2.1 Y.1 | length 2.6
  Top Layer w0.254: Y.1 C12.2 30.53,28.181 30.53,27.217 R2.1
NetD1_A: D1.A R3.2 | length 2.3
  Top Layer w0.813: D1.A R3.2
NetR1_1: R1.1 U2.44 | length 17.2
  Top Layer w0.254: R1.1 30.464,43.586 30.515,43.637 37.498,43.637 37.777,43.358 v1(37.846,43.358) ; v1(37.846,40.767) 37.846,39.091 37.852,39.085 U2.44
  Bottom Layer w0.254: v1(37.846,40.767) v1(37.846,43.358)
NetR2_2: R2.2 U2.6 | length 9.1
  Top Layer w0.3: R2.2 32.12,27.867 31.987,27.999 31.987,28.225 31.471,28.741 31.471,29.891 31.449,29.914 31.449,30.289 31.471,30.311 31.471,32.8 31.647,32.976 U2.6
NRST: C11.2 S1.2 U2.7 | length 14.5
  Top Layer w0.254: v1(32.233,32.08) 32.357,32.08 32.753,32.476 U2.7
  Bottom Layer w0.254: S1.2 23.801,31.293 25.909,33.401 30.913,33.401 v1(32.233,32.08) 32.843,32.69 C11.2
OUT/IN: C13.2 U2.5 Y.3 | length 8.2
  Top Layer w0.254: Y.3 C13.2 ; 32.183,34.138 32.183,34.112 32.819,33.476 U2.5@34.502,33.476
  Top Layer w0.3: C13.2 28.691,33.477 28.791,33.577 28.791,34.011 28.918,34.138 32.183,34.138
PA0: P4.13 R28.2 R29.1 U2.10 | length 54.7
  Top Layer w0.254: R28.2 6.592,38.365 6.781,38.176 8.486,38.176 9.147,37.516 11.552,37.516 11.961,37.107 13.972,37.107 14.102,37.236 20.247,37.236 20.396,37.088 20.396,22.45 20.545,22.301 28.489,22.301 32.749,26.561 32.749,27.693 32.741,27.701 32.741,30.297 33.411,30.967 34.493,30.967 U2.10
  Top Layer w1: P4.13 R28.2@6.541,39.167
  Bottom Layer w1: P4.13@4.064,38.964 R29.1@6.618,38.964
PA1: P4.12 R26.2 R27.1 U2.11 | length 52.7
  Top Layer w0.254: R26.2 6.541,36.627 6.541,35.876 7.573,35.876 7.626,35.823 8.018,35.823 8.89,34.95 11.146,34.95 11.468,34.628 19.511,34.628 19.66,34.479 19.66,22.044 19.808,21.895 28.96,21.895 29.261,22.196 29.261,22.495 29.286,22.52 29.286,22.524 33.156,26.393 33.156,27.861 33.147,27.87 33.147,30.129 33.486,30.467 34.493,30.467 U2.11
  Top Layer w1: P4.12 R26.2@6.541,36.627
  Bottom Layer w1: P4.12@3.835,36.627 R27.1@6.389,36.627
PA2: P4.11 R24.2 R25.1 U2.12 | length 51.2
  Top Layer w0.254: R24.2 6.44,33.281 6.726,32.995 8.78,32.995 9.398,32.376 11.012,32.376 11.359,32.029 12.4,32.029 12.604,32.233 16.104,32.233 16.278,32.407 16.488,32.407 16.593,32.512 18.847,32.512 19.072,32.287 19.072,21.637 19.221,21.488 29.366,21.488 29.667,21.79 29.667,22.327 33.934,26.594 33.934,29.955 33.956,29.976 U2.12
  Top Layer w1: P4.11@3.708,34.061 R24.2@6.211,34.061
  Bottom Layer w1: P4.11@3.886,34.061 R25.1
PA3: P4.10 R22.2 R23.1 U2.13 | length 47.6
  Top Layer w0.254: R22.2 6.491,30.745 6.654,30.582 8.052,30.582 8.839,29.794 11.654,29.794 12.111,29.337 16.156,29.337 16.305,29.188 16.305,21.75 16.973,21.082 29.534,21.082 30.074,21.621 30.074,22.071 35.72,27.717 35.831,27.717 35.852,27.739 U2.13
  Top Layer w1: P4.10@3.708,31.521 R22.2@6.287,31.521
  Bottom Layer w1: P4.10@3.886,31.521 R23.1@6.44,31.521
PA4: P4.9 R20.2 R21.1 U2.14 | length 46.8
  Top Layer w0.254: R20.2 6.643,27.991 6.668,27.965 8.204,27.965 8.64,27.53 15.469,27.53 15.617,27.381 15.617,20.824 15.766,20.676 29.87,20.676 30.861,21.666 30.861,22.128 36.281,27.548 36.281,27.643 36.352,27.714 U2.14
  Top Layer w1: P4.9@3.937,28.993 R20.2@6.516,28.993
  Bottom Layer w1: P4.9 R21.1@6.668,29.007
PA5: P4.8 R18.2 R19.1 U2.15 | length 45
  Top Layer w0.254: R18.2 6.592,25.603 6.618,25.578 8.382,25.578 9.178,24.782 11.129,24.782 11.333,24.578 14.157,24.578 14.58,24.155 14.58,20.57 14.881,20.269 30.277,20.269 31.471,21.463 31.471,22.163 36.688,27.38 36.688,27.455 36.781,27.548 36.781,27.643 36.852,27.714 U2.15
  Top Layer w1: P4.8 R18.2@6.618,26.467
  Bottom Layer w1: P4.8 R19.1@6.668,26.467
PA6: P4.7 R16.2 R17.1 U2.16 | length 43.6
  Top Layer w0.254: R16.2 6.668,23.927 6.668,23.235 6.866,23.038 8.611,23.038 9.432,22.216 10.58,22.216 10.876,21.92 13.161,21.92 13.31,21.771 13.31,20.523 14.173,19.66 30.407,19.66 30.556,19.808 30.556,19.812 32.08,21.336 32.08,22.198 37.094,27.212 37.094,27.286 37.188,27.38 37.188,27.455 37.281,27.548 37.281,27.643 37.352,27.714 U2.16
  Top Layer w1: P4.7 6.668,23.927 R16.2@6.694,23.927
  Bottom Layer w1: P4.7 R17.1@6.668,23.927
PA7: P4.6 R14.2 R15.1 U2.17 | length 42.5
  Top Layer w0.254: R14.2 6.694,21.337 7.615,20.416 7.62,20.422 8.56,20.422 8.899,20.083 10.774,20.083 10.809,20.047 10.835,20.047 11.629,19.253 30.886,19.253 32.766,21.133 32.766,22.309 37.5,27.043 37.5,27.118 37.594,27.212 37.594,27.286 37.688,27.38 37.688,27.455 37.781,27.548 37.781,27.643 37.852,27.714 U2.17
  Top Layer w1: P4.6@3.937,21.373 R14.2@6.516,21.373
  Bottom Layer w1: P4.6 R15.1@6.668,21.387
PA8: P5.5 R40.2 R41.1 U2.29 | length 32.5
  Top Layer w0.254: U2.29 44.706,31.976 46.939,29.743 46.939,21.268 50.758,17.45 53.708,17.45 54.521,18.263 56.214,18.263 56.363,18.411 56.363,19.214 R40.2
  Top Layer w1: R40.2@56.451,19.253 P5.5@59.792,19.253
  Bottom Layer w1: R41.1@56.718,19.253 P5.5@60.059,19.253
PA9: P5.6 R42.2 R43.1 U2.30 | length 31
  Top Layer w0.254: U2.30 44.867,32.476 47.422,29.921 47.422,23.332 50.917,19.838 53.137,19.838 54.076,20.777 56.366,20.777 56.515,20.926 56.515,21.627 R42.2
  Top Layer w1: R42.2@56.552,21.819 P5.6@59.893,21.819
  Bottom Layer w1: R43.1@56.744,21.819 P5.6@60.085,21.819
PA10: P5.7 R44.2 R45.1 U2.31 | length 29.4
  Top Layer w0.254: U2.31 45.002,32.976 47.879,30.099 47.879,24.867 50.063,22.682 50.063,22.677 50.465,22.276 51.633,22.276 52.726,23.368 56.341,23.368 56.49,23.517 56.49,24.193 R44.2
  Top Layer w1: R44.2@56.781,24.384 P5.7@60.122,24.384
  Bottom Layer w1: R45.1@56.591,24.384 P5.7@59.932,24.384
PA11: P5.8 R46.2 R47.1 U2.32 | length 26.8
  Top Layer w0.254: U2.32 45.238,33.476 48.362,30.353 48.362,27.346 50.714,24.994 53.543,24.994 54.381,25.832 56.2,25.832 56.349,25.981 R46.2
  Top Layer w1: R46.2@56.527,26.797 P5.8@59.868,26.797
  Bottom Layer w1: R47.1@56.794,26.797 P5.8@60.135,26.797
PA12: P5.9 R48.2 R49.1 U2.33 | length 25.6
  Top Layer w0.254: U2.33 45.087,33.976 45.179,33.884 45.517,33.884 48.92,30.48 48.92,28.575 49.733,27.762 50.059,27.762 50.465,27.356 51.633,27.356 52.675,28.397 56.214,28.397 56.363,28.546 56.363,29.401 R48.2
  Top Layer w1: R48.2@56.781,29.464 P5.9@60.122,29.464
  Bottom Layer w1: R49.1@56.617,29.464 P5.9@59.958,29.464
PA15: P5.10 R50.2 R51.1 U2.38 | length 30.9
  Top Layer w0.254: U2.38 40.852,38.358 41.001,38.506 45.872,38.506 47.93,36.449 47.93,32.461 49.784,30.607 50.27,30.607 50.723,30.154 53.583,30.154 54.417,30.988 56.251,30.988 56.4,31.137 R50.2
  Top Layer w1: R50.2@56.781,32.004 P5.10@60.122,32.004
  Bottom Layer w1: R51.1@56.718,32.004 P5.10@60.059,32.004
PB0: P4.5 R12.2 R13.1 U2.18 | length 43.4
  Top Layer w0.254: R12.2 7.466,18.847 7.614,18.996 7.614,19.513 7.778,19.676 10.605,19.676 10.749,19.533 10.774,19.533 11.46,18.847 31.394,18.847 33.376,20.828 33.376,22.344 36.703,25.671 37.907,26.875 37.907,26.95 38,27.043 38,27.118 38.094,27.212 38.094,27.286 38.188,27.38 38.188,27.424 38.343,27.58 38.343,28.617 U2.18
  Top Layer w1: P4.5 R12.2@6.618,18.847
  Bottom Layer w1: P4.5 R13.1@6.668,18.847
PB1: P4.4 R10.2 R11.1 U2.19 | length 44.3
  Top Layer w0.254: R10.2 7.608,17.247 14.656,17.247 15.85,18.44 32.004,18.44 34.087,20.523 34.087,22.48 38.313,26.707 38.313,26.781 38.407,26.875 38.407,26.95 38.5,27.043 38.5,27.118 38.594,27.212 38.594,27.256 38.843,27.505 38.843,28.617 U2.19
  Top Layer w1: P4.4 R10.2@6.694,16.307
  Bottom Layer w1: P4.4 R11.1@6.668,16.307
PB2: P4.3 R8.2 R9.1 U2.20 | length 46.1
  Top Layer w0.254: R8.2 7.532,14.58 13.665,14.58 16.866,17.78 32.156,17.78 34.696,20.32 34.696,22.515 38.72,26.538 38.72,26.613 38.813,26.707 38.813,26.781 38.907,26.875 38.907,26.95 39,27.043 39,27.088 39.343,27.43 39.343,28.617 U2.20
  Top Layer w1: P4.3@3.937,13.753 R8.2@6.516,13.753
  Bottom Layer w1: P4.3 R9.1@6.668,13.767
PB3: P5.11 R52.2 R53.1 U2.39 | length 30.4
  Top Layer w0.254: U2.39 40.352,38.942 40.501,39.091 45.974,39.091 48.336,36.728 48.336,34.565 50.465,32.436 51.633,32.436 52.624,33.426 56.366,33.426 56.515,33.575 56.515,34.302 R52.2
  Top Layer w1: R52.2@56.527,34.366 P5.11@59.868,34.366
  Bottom Layer w1: R53.1@56.744,34.366 P5.11@60.085,34.366
PB4: P5.12 R54.2 R55.1 U2.40 | length 29.4
  Top Layer w0.254: U2.40 39.852,39.45 40.001,39.599 46.226,39.599 50.622,35.202 53.567,35.202 54.357,35.992 56.544,35.992 56.693,36.141 56.693,36.715 R54.2
  Top Layer w1: R54.2@56.552,37.008 P5.12@59.893,37.008
  Bottom Layer w1: R55.1@56.566,37.008 P5.12@59.907,37.008
PB5: P5.13 R56.2 R57.1 U2.41 | length 29.2
  Top Layer w0.254: U2.41 39.352,39.907 39.501,40.056 46.761,40.056 48.616,38.202 49.779,38.202 50.465,37.516 51.633,37.516 52.624,38.506 56.251,38.506 56.4,38.655 R56.2
  Top Layer w1: R56.2@56.552,39.522 P5.13@59.893,39.522
  Bottom Layer w1: R57.1@56.54,39.522 P5.13@59.881,39.522
PB6: P5.14 R58.2 R59.1 U2.42 | length 29.6
  Top Layer w0.254: U2.42 38.852,40.466 39.001,40.615 49.7,40.615 50.259,40.056 51.633,40.056 52.573,40.996 56.29,40.996 56.439,41.144 56.439,41.998 R58.2
  Top Layer w1: R58.2@56.552,42.088 P5.14@59.893,42.088
  Bottom Layer w1: R59.1@56.363,42.088 P5.14@59.704,42.088
PB7: P5.15 R60.2 R61.1 U2.43 | length 31.5
  Top Layer w0.254: U2.43 38.352,37.739 38.422,37.809 38.422,40.763 38.681,41.021 47.008,41.021 49.421,43.434 50.017,42.838 53.069,42.838 53.818,43.586 56.417,43.586 56.566,43.735 56.566,44.411 R60.2
  Top Layer w1: R60.2@56.603,44.577 P5.15@59.944,44.577
  Bottom Layer w1: R61.1@56.49,44.577 P5.15@59.831,44.577
PB8: P5.16 R62.2 R63.1 U2.45 | length 33.7
  Top Layer w0.254: U2.45 37.352,37.739 37.281,37.809 37.281,39.798 37.186,39.894 37.186,41.355 37.334,41.504 44.546,41.504 48.584,45.542 49.853,45.542 50.259,45.136 51.633,45.136 52.726,46.228 56.214,46.228 56.363,46.377 56.363,47.23 R62.2
  Top Layer w1: R62.2@56.781,47.244 P5.16@60.122,47.244
  Bottom Layer w1: R63.1@56.337,47.244 P5.16@59.678,47.244
PB9: P4.14 R30.2 R31.1 U2.46 | length 39
  Top Layer w0.254: R30.2 6.567,41.708 7.367,40.907 8.775,40.907 9.576,40.107 36.398,40.107 36.852,39.653 U2.46
  Top Layer w1: P4.14 R30.2@6.541,41.707
  Bottom Layer w1: P4.14 R31.1@6.668,41.707
PB10: P4.2 R6.2 R7.1 U2.21 | length 51.9
  Top Layer w0.254: R6.2 6.668,11.228 8.38,9.516 9.11,9.516 9.38,9.246 13.364,9.246 13.513,9.394 13.513,13.31 17.247,17.043 32.41,17.043 35.433,20.066 35.433,22.677 39.126,26.37 39.126,26.445 39.22,26.538 39.22,26.613 39.313,26.707 39.313,26.771 39.843,27.301 39.843,28.617 U2.21
  Top Layer w1: P4.2 R6.2@6.618,11.227
  Bottom Layer w1: P4.2 R7.1@6.668,11.227
PB11: P4.1 R4.2 R5.1 U2.22 | length 56.2
  Top Layer w0.254: R5.1 6.694,7.468 8.593,7.468 9.736,6.325 14.304,6.325 14.453,6.473 14.453,12.903 17.78,16.231 32.537,16.231 36.144,19.837 36.144,22.813 39.532,26.202 39.532,26.276 39.626,26.37 39.626,26.445 39.72,26.538 39.72,26.603 40.343,27.226 40.343,28.617 U2.22
  Top Layer w1: P4.1 R5.1
  Bottom Layer w1: P4.1 R4.2
PB12: P5.1 R32.2 R33.1 U2.25 | length 41.9
  Top Layer w0.254: U2.25 44.243,29.976 45.212,29.007 45.212,10.866 48.585,7.493 56.099,7.493 56.247,7.642 R32.2
  Top Layer w1: R32.2 59.741,9.017 P5.1
  Bottom Layer w1: R33.1@56.515,9.017 P5.1@59.856,9.017
PB13: P5.2 R34.2 R35.1 U2.26 | length 38.9
  Top Layer w0.254: U2.26 44.327,30.476 45.618,29.185 45.618,14.422 50.465,9.576 52.192,9.576 52.463,9.846 53.442,9.846 54.111,10.516 56.172,10.516 56.363,10.706 56.363,11.416 R34.2
  Top Layer w1: R34.2@56.501,11.481 P5.2@59.842,11.481
  Bottom Layer w1: R35.1@56.363,11.481 P5.2@59.704,11.481
PB14: P5.3 R36.2 R37.1 U2.27 | length 37
  Top Layer w0.254: U2.27 44.411,30.976 46.025,29.362 46.025,16.701 50.537,12.188 51.706,12.188 51.837,12.319 54.101,12.319 55.02,13.237 56.515,13.237 56.515,14.007 R36.2
  Top Layer w1: R36.2@56.425,14.122 P5.3@59.766,14.122
  Bottom Layer w1: R37.1@56.54,14.122 P5.3@59.881,14.122
PB15: P5.4 R38.2 R39.1 U2.28 | length 35.1
  Top Layer w0.254: U2.28 44.546,31.476 46.482,29.54 46.482,18.872 50.038,15.316 50.363,15.316 50.668,15.011 53.823,15.011 54.601,15.79 56.667,15.79 56.667,16.42 R38.2
  Top Layer w1: R38.2@56.781,16.764 P5.4@60.122,16.764
  Bottom Layer w1: R39.1@56.82,16.764 P5.4@60.161,16.764
SWCLK: P2.3 U2.37 | length 22.6
  Top Layer w0.254: P2.3 30.683,43.231 35.005,43.231 35.712,42.523 v1(35.712,41.072) ; U2.37 41.352,37.444 41.364,37.456 v1(44.111,37.456)
  Bottom Layer w0.254: v1(35.712,41.072) 35.761,41.023 35.761,40.464 36.982,39.243 42.342,39.243 44.111,37.474 v1(44.111,37.456)
SWDIO: P2.2 U2.34 | length 27.2
  Top Layer w0.254: P2.2 30.404,41.807 31.422,42.824 33.401,42.824 v1(33.858,42.367) ; U2.34 45.161,34.476 45.347,34.29 45.685,34.29 46.015,33.96 v1(46.965,33.96)
  Bottom Layer w0.254: v1(33.858,42.367) 36.224,42.367 36.449,42.142 36.449,40.538 37.03,39.958 37.24,39.958 37.414,40.132 42.232,40.132 46.965,35.4 v1(46.965,33.96)
pads on no net: U2.1 U2.2

## Polygon pours and split planes (outlines as drawn)
GND on Bottom Layer "NONET_L04_P001" (solid, remove dead copper, shelved, pour order 1): 0.152,3.38 cw(c0.152,3.787) -0.254,3.787 -0.254,51.841 cw(c0.152,51.841) 0.152,52.248 62.606,52.248 cw(c62.992,52.121) 63.391,52.198 cw(c63.195,51.841) 63.602,51.841 cw(c63.195,51.841) 63.399,51.489 63.399,39.531 cw(c62.992,39.531) 63.319,39.29 cw(c62.992,39.048) 63.399,39.048 63.399,13.436 63.399,4.048 cw(c63.221,3.682) 63.628,3.682 cw(c63.221,3.682) 63.221,3.276
GND on Top Layer "NONET_L01_P000" (solid, remove dead copper, shelved, pour order 0): 0.152,3.38 cw(c0.152,3.787) -0.254,3.787 -0.254,51.841 cw(c0.152,51.841) 0.152,52.248 62.606,52.248 cw(c62.992,52.121) 63.391,52.198 cw(c63.195,51.841) 63.602,51.841 cw(c63.195,51.841) 63.399,51.489 63.399,39.531 cw(c62.992,39.531) 63.319,39.29 cw(c62.992,39.048) 63.399,39.048 63.399,13.436 63.399,4.048 cw(c63.221,3.682) 63.628,3.682 cw(c63.221,3.682) 63.221,3.276
+3.3V on 3.3V_layer (split plane): 62.978,51.901 63.029,51.839 62.974,51.773 62.927,51.685 62.898,51.589 62.888,51.489 62.888,39.561 62.848,39.485 62.819,39.389 62.809,39.29 62.819,39.19 62.848,39.094 62.888,39.019 62.888,13.436 62.888,4.048 62.898,3.949 62.927,3.853 62.963,3.786 0.256,3.891 0.256,51.738 62.606,51.738 62.705,51.748 62.801,51.777 62.889,51.824 62.967,51.887 62.978,51.901
GND on GND_layer (split plane): 62.978,51.901 63.029,51.839 62.974,51.773 62.927,51.685 62.898,51.589 62.888,51.489 62.888,39.561 62.848,39.485 62.819,39.389 62.809,39.29 62.819,39.19 62.848,39.094 62.888,39.019 62.888,13.436 62.888,4.048 62.898,3.949 62.927,3.853 62.963,3.786 0.256,3.891 0.256,51.738 62.606,51.738 62.705,51.748 62.801,51.777 62.889,51.824 62.967,51.887 62.978,51.901

## Keep-outs
Keep-Out Layer:
  lines w0.813: 62.992,3.948 62.992,13.436 ; 62.992,13.309 62.992,39.048 ; 62.992,39.531 62.992,52.121 ; 63.195,51.841 0.152,51.841 0.152,3.787 63.221,3.682

## Silkscreen, mask and mechanical layers (free items; w line width, h text height)
Top Overlay:
  text "GND" at 1.727,49.922 h0.85
  text "Carte STM32F" at 36.804,49.295 h1.5
  text "PB8" at 51.104,46.553 h1.5
  text "+9V" at 1.905,44.739 h0.85
  text "PB7" at 51.104,43.992 h1.5
  text "PB6" at 51.104,41.472 h1.5
  text "PB9" at 9.499,41.242 h1.5
  text "GND" at 26.05,39.238 h0.82 r90
  text "GND" at 28.006,39.014 h0.85 r90
  text "PB5" at 51.104,38.932 h1.5
  text "Boot0" at 24.576,38.795 h0.82 r90
  text "PA0" at 9.499,38.703 h1.5
  text "+3.3V" at 23.164,38.674 h0.84 r90
  text "+3.3V" at 32.095,38.328 h0.85 r90
  text "SWCLK" at 29.367,38.023 h0.85 r90
  text "SWDIO" at 30.731,38.023 h0.85 r90
  text "PB4" at 51.104,36.375 h1.5
  text "PA1" at 9.499,36.144 h1.5
  text "PB3" at 51.104,33.852 h1.5
  text "PA2" at 9.499,33.604 h1.5
  text "PA15" at 50.723,31.439 h1.5
  text "PA3" at 9.499,31.083 h1.5
  text "PA12" at 50.749,28.752 h1.5
  text "PA4" at 9.499,28.527 h1.5
  text "PA11" at 50.825,26.238 h1.5
  text "PA5" at 9.499,26.003 h1.5
  text "PA10" at 50.749,23.692 h1.5
  text "PA6" at 9.499,23.463 h1.5
  text "PA9" at 51.104,21.15 h1.5
  text "PA7" at 9.499,20.904 h1.5
  text "PA8" at 51.104,18.613 h1.5
  text "PB0" at 9.499,18.383 h1.5
  text "PB15" at 50.469,16.021 h1.5
  text "PB1" at 9.499,15.824 h1.5
  text "PB14" at 50.419,13.49 h1.5
  text "PB2" at 9.499,13.284 h1.5
  text "PB13" at 50.419,10.966 h1.5
  text "PB10" at 9.499,10.763 h1.5
  text "PB12" at 50.292,8.483 h1.5
  text "PB11" at 9.499,8.204 h1.5
  text "1ere carte Julien Gouban 13/11/2023" at 15.773,5.515 h0.8

## Dimensions
62.992,52.121 to 62.992,3.948 on Mechanical 15
0.152,3.787 to 71.755,38.769 on Mechanical 15